# EAGLE board expansion_mrf24j40ma (EAGLE 5.11)
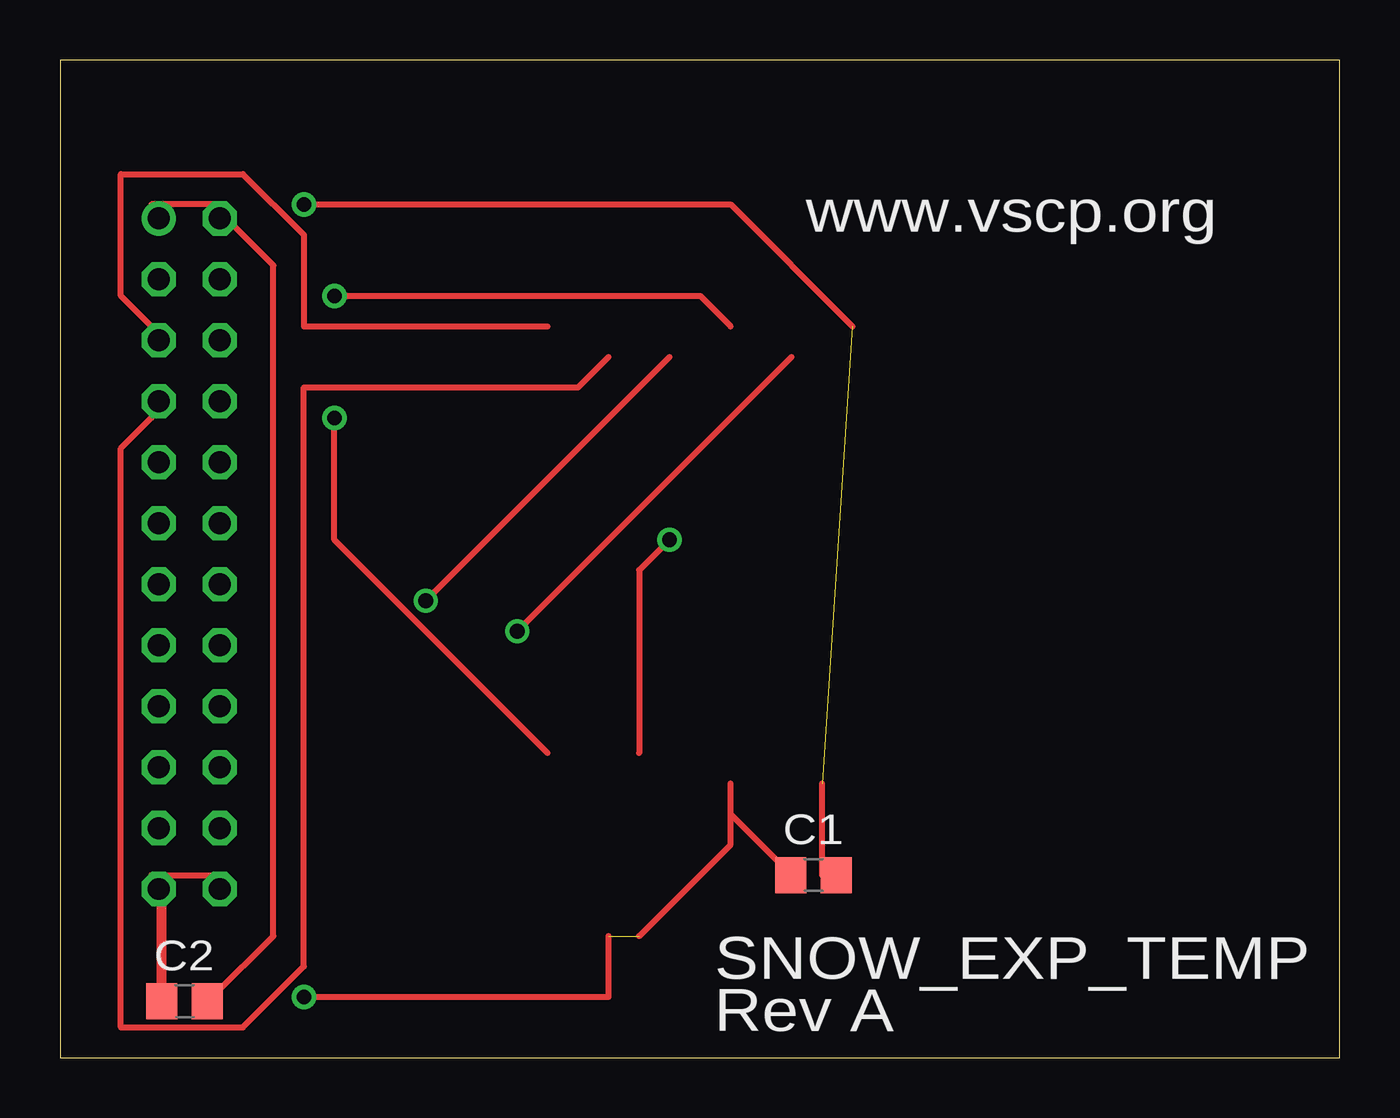
[diagram p0: board, top side]
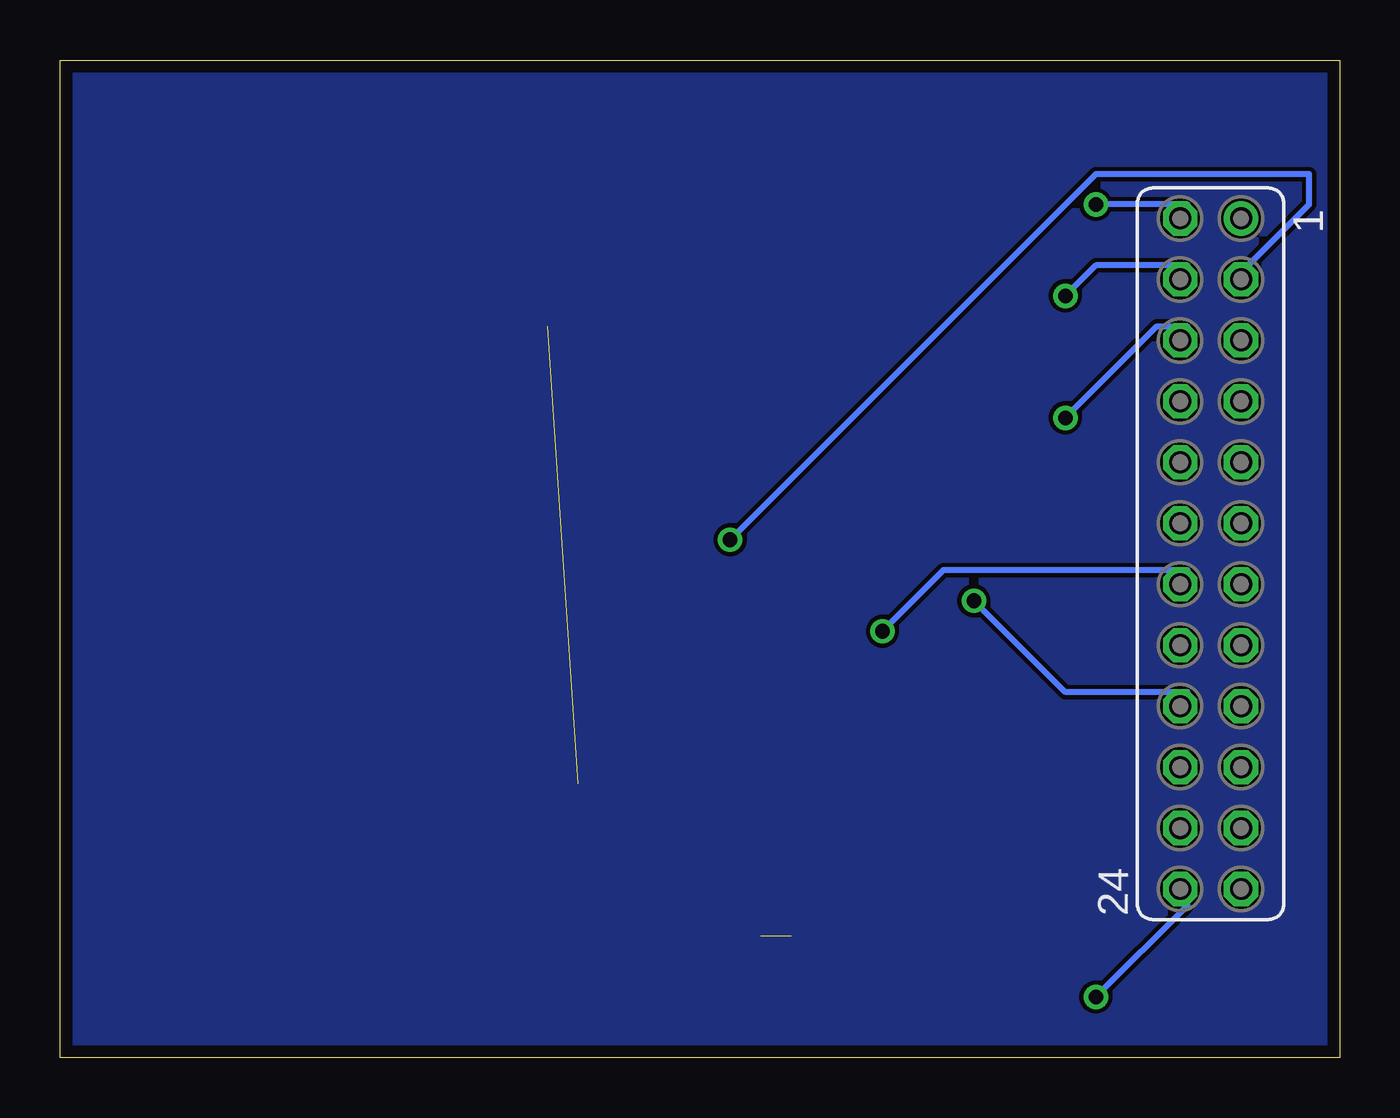
[diagram p1: board, bottom side, seen from below]

Size 53.32 x 41.58 mm. Coordinates in mm from the lower left corner, seen from the top.
Outline: 0,0 53.32,0 53.32,41.58 0,41.58 0,0
Copper layers (1*16): Top 0.0356mm / dielectric 1.5011mm / Bottom 0.0356mm
Design rules "SilverCircuits": minimum track width 7mil, minimum drill 14mil, track to track 7mil, track to pad 7mil, pad to pad 7mil, via to via 7mil, smd to smd 0mil, copper to edge 20mil, drill to drill 8mil, minimum pad ring 10mil, minimum via ring 8mil, stop-mask expansion 4mil, vias tented up to drill 0mil, thermal gap 10mil

## Footprints (pad centres in the part's own frame; a part is rotated, then mirrored left to right if it is on the bottom)
C0805 = smd 1.3 x 1.5: 1 -0.95,0; 2 0.95,0
FE12-2 = drill 0.914 round: 1 -13.97,1.27 | drill 0.914 octagon: 2 -13.97,-1.27; 3 -11.43,1.27; 4 -11.43,-1.27; 5 -8.89,1.27; 6 -8.89,-1.27; 7 -6.35,1.27; 8 -6.35,-1.27; 9 -3.81,1.27; 10 -3.81,-1.27; 11 -1.27,1.27; 12 -1.27,-1.27; 13 1.27,1.27; 14 1.27,-1.27; 15 3.81,1.27; 16 3.81,-1.27; 17 6.35,1.27; 18 6.35,-1.27; 19 8.89,1.27; 20 8.89,-1.27; 21 11.43,1.27; 22 11.43,-1.27; 23 13.97,1.27; 24 13.97,-1.27

## Placement (x,y rotation side)
C1  100n  [C0805]  31.4,7.62 0 top
C2  100n  [C0805]  5.19,2.36 0 top
JP1  [FE12-2]  5.38,21.01 270 bottom

## Library data of the parts
C1 C2 = rcl
JP1 = con-lsta; OC_FARNELL: unknown; OC_NEWARK: unknown

## Nets
+3V3: C1.1 C2.1 JP1.23 JP1.24
CS_MRF24J40MA: JP1.3
GND: C1.2 C2.2 JP1.1 JP1.2
INT0: JP1.18
N$9: JP1.22
N$10: JP1.20
N$12: JP1.16
N$14: JP1.12
N$15: JP1.10
N$16: JP1.8
N$21: JP1.21
N$22: JP1.19
N$23: JP1.17
N$24: JP1.15
N$25: JP1.13
N$26: JP1.11
N$27: JP1.9
RESET: JP1.14
SCK1: JP1.5
SDI1: JP1.6
SDO1: JP1.7
WAKE_MRF24J40MA: JP1.4

## Tracks (layer width: path | path; a pad name or v marks a point on that pad's centre or on a via)
+3V3  (via drill 0.61)  (1 unrouted)
  Top 0.254: JP1.24 6.35,7.62 3.81,7.62 JP1.23 | 24.13,5.08 27.94,8.89 27.94,10.16 | 27.94,10.16 27.94,11.43 | 27.94,10.16 30.48,7.62 C1.1 | v10.16,2.54 22.86,2.54 22.86,5.08
  Top 0.406: JP1.23 4.24,7.04 C2.1
  Bottom 0.254: v10.16,2.54 6.35,6.35 JP1.24
CS_MRF24J40MA  (via drill 0.61)
  Top 0.254: v25.4,21.59 24.13,20.32 24.13,12.7
  Bottom 0.254: v25.4,21.59 10.16,36.83 1.27,36.83 1.27,35.56 3.81,33.02 JP1.3
GND  (via drill 0.61)  (1 unrouted)
  Top 0.254: 31.75,11.43 31.75,7.62 C1.2 | 6.35,35.56 8.89,33.02 8.89,5.08 6.35,2.54 C2.2 | 6.35,35.56 3.81,35.56 JP1.1 | 6.35,35.56 JP1.2 | 33.02,30.48 27.94,35.56 v10.16,35.56
  Bottom 0.254: v10.16,35.56 6.35,35.56 JP1.2
INT0  (via drill 0.61)
  Top 0.254: v15.24,19.05 25.4,29.21
  Bottom 0.254: v15.24,19.05 11.43,15.24 6.35,15.24 JP1.18
N$1
  pour Bottom: 0.28,41.29 0.25,41.29 0.25,0.08 53.25,0.08 53.25,0.17 53,0.17 53,41.37 0.51,41.37 0.51,40.95
RESET  (via drill 0.61)
  Top 0.254: v19.05,17.78 30.48,29.21
  Bottom 0.254: v19.05,17.78 16.51,20.32 6.35,20.32 JP1.14
SCK1
  Top 0.254: 20.32,30.48 10.16,30.48 10.16,34.29 7.62,36.83 2.54,36.83 2.54,31.75 3.81,30.48 JP1.5
SDI1  (via drill 0.61)
  Top 0.254: 20.32,12.7 11.43,21.59 v11.43,26.67
  Bottom 0.254: v11.43,26.67 7.62,30.48 6.35,30.48 JP1.6
SDO1
  Top 0.254: 22.86,29.21 21.59,27.94 10.16,27.94 10.16,3.81 7.62,1.27 2.54,1.27 2.54,25.4 3.81,26.67 JP1.7
WAKE_MRF24J40MA  (via drill 0.61)
  Top 0.254: 27.94,30.48 26.67,31.75 v11.43,31.75
  Bottom 0.254: v11.43,31.75 10.16,33.02 6.35,33.02 JP1.4

## Text on the board
tNames: www.vscp.org | SNOW_EXP_TEMP | Rev A